# EAGLE board Projeto - Cuspideira (EAGLE 9.7.0)

Size 161.75 x 76.85 mm. Coordinates in mm from the lower left corner, seen from the top.
Outline: 0,0 161.75,0 161.75,76.86 0,76.86 0,0
Copper layers (1*16): Top 0.035mm / dielectric 1.5mm / Bottom 0.035mm
Design rules "default": minimum track width 6mil, minimum drill 0.35mm, track to track 6mil, track to pad 6mil, pad to pad 6mil, via to via 6mil, smd to smd 6mil, copper to edge 40mil, drill to drill 6mil, minimum pad ring 10mil, minimum via ring 8mil, stop-mask expansion 4mil, vias tented up to drill 0mil, thermal gap 10mil

## Footprints (pad centres in the part's own frame; a part is rotated, then mirrored left to right if it is on the bottom)
DIODE-AXIAL = drill 1: 1 -5.08,0; 2 5.08,0
LEDRD254W60D565H860B = drill 0.981 pad 1.581: 1 -1.27,0; 2 1.27,0
LU-5-R = drill 0.8: 1 -6.35,-3.81; 5 3.81,-3.81; 6 6.35,-3.81; 7 6.35,3.81; 8 3.81,3.81; 12 -6.35,3.81
BATTERY-GENERIC = drill 1.118 pad 3.15 octagon: + 2.54,0; - -2.54,0
TO220V = drill 1.016 long: 1 -2.54,-2.54; 2 0,-2.54; 3 2.54,-2.54
RESAD1016W63L850D250B = drill 0.83 pad 1.43: 1 -5.08,0; 2 5.08,0
SWITCH-MOMENTARY-PTH-6.5MM = drill 1.016 pad 1.88: 1 -3.251,2.261; 2 3.251,2.261; 3 -3.251,-2.261; 4 3.251,-2.261
ARDUINO-UNO-R3-SHIELD = drill 1.016 pad 1.88: 3.3V 24.13,-2.54; 5V 24.13,0; A0 24.13,12.7; A1 24.13,15.24; A2 24.13,17.78; A3 24.13,20.32; A4 24.13,22.86; A5 24.13,25.4; AREF -24.13,-13.97; D2 -24.13,20.32; D3 -24.13,17.78; D4 -24.13,15.24; D5 -24.13,12.7; D6 -24.13,10.16; D7 -24.13,7.62; D8 -24.13,3.81; D9 -24.13,1.27; D10 -24.13,-1.27; D11 -24.13,-3.81; D12 -24.13,-6.35; D13 -24.13,-8.89; GND@0 24.13,2.54; GND@1 24.13,5.08; GND@2 -24.13,-11.43; IOREF 24.13,-7.62; NC 24.13,-10.16; RES 24.13,-5.08; RX -24.13,25.4; SCL -24.13,-19.05; SDA -24.13,-16.51; TX -24.13,22.86; VIN 24.13,7.62

## Placement (x,y rotation side)
D1  DIODEDIODE-AXIAL  [DIODE-AXIAL]  132.56,22 0 top
D2  RED  [LEDRD254W60D565H860B]  154.15,37.24 0 top
K1  RELAY-SPDT_LU-5-R  [LU-5-R]  141.45,30.89 180 top
P1  BATTERYGENERIC  [BATTERY-GENERIC]  144.13,68.6 180 top
Q1  TIP120_TO220-V  [TO220V]  117.32,39.78 0 top
R1  1k  [RESAD1016W63L850D250B]  109.7,24.54 180 top
R2  1k  [RESAD1016W63L850D250B]  155.42,29.62 90 top
S1  SWITCH_MOMENTARY  [SWITCH-MOMENTARY-PTH-6.5MM]  94.46,30.89 90 top
U1  ARDUINO-UNO-R3-SHIELD  [ARDUINO-UNO-R3-SHIELD]  47.88,29.84 270 top

## Library data of the parts
D1 K1 P1 Q1 R1 R2 S1 U1 = Tinkercad
D2 = Tinkercad; CATEGORY: Opto-Electronic; SUB-CATEGORY: LED; VALUE: LED_RED

## Nets
D2_A: D2.1 K1.6
D2_C: D2.2 R2.2
P1-: P1.- Q1.3 R2.1 S1.3 S1.4 U1.GND@0 U1.GND@1 U1.GND@2
Q1_B: Q1.1 R1.1
Q1_C: D1.1 K1.5 Q1.2
U1_5V: D1.2 K1.1 K1.8 K1.12 U1.5V
U1_D2: S1.1 S1.2 U1.D2
U1_D8: R1.2 U1.D8

## Tracks (layer width: path | path; a pad name or v marks a point on that pad's centre or on a via)
D2_A  (1 unrouted)
D2_C  (1 unrouted)
P1-  (7 unrouted)
Q1_B  (1 unrouted)
Q1_C  (2 unrouted)
U1_5V  (4 unrouted)
U1_D2  (2 unrouted)
U1_D8  (1 unrouted)